# EAGLE board PCB-neue-Widerstände_2025-07-04.PCB (EAGLE 9.6.2)
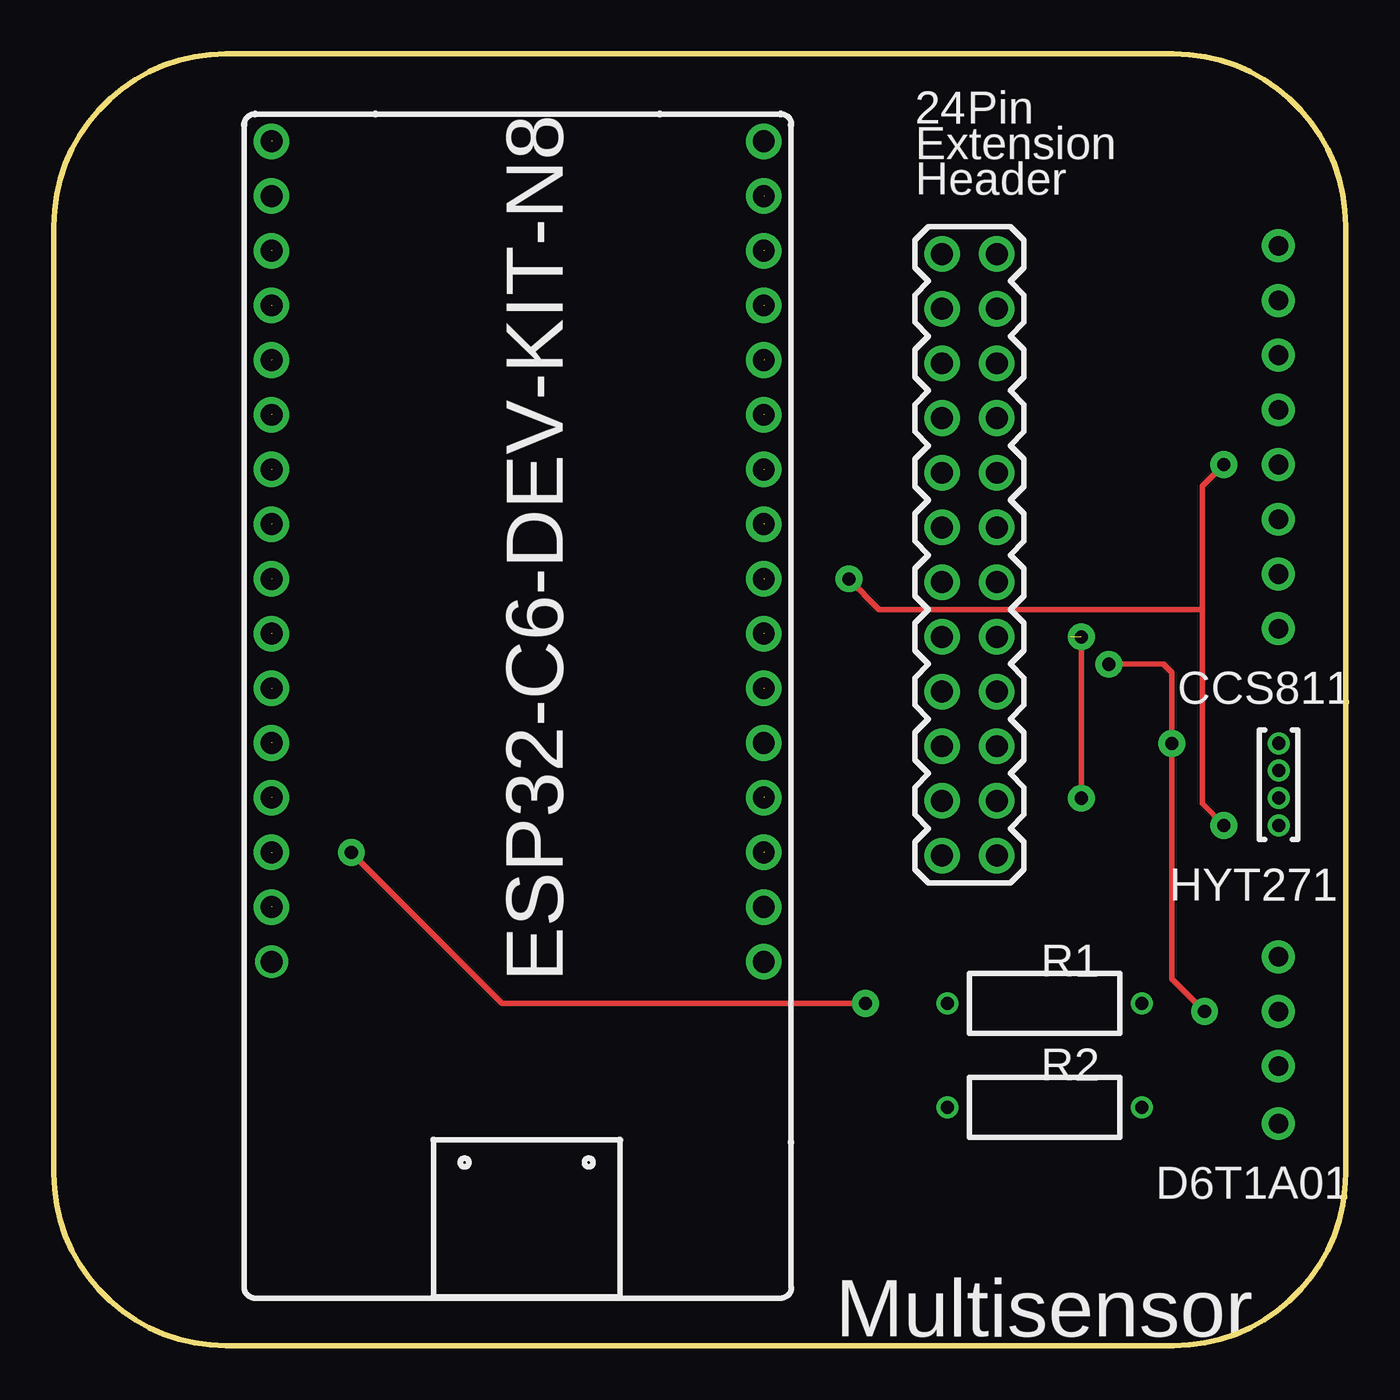
[diagram p0: board, top side]
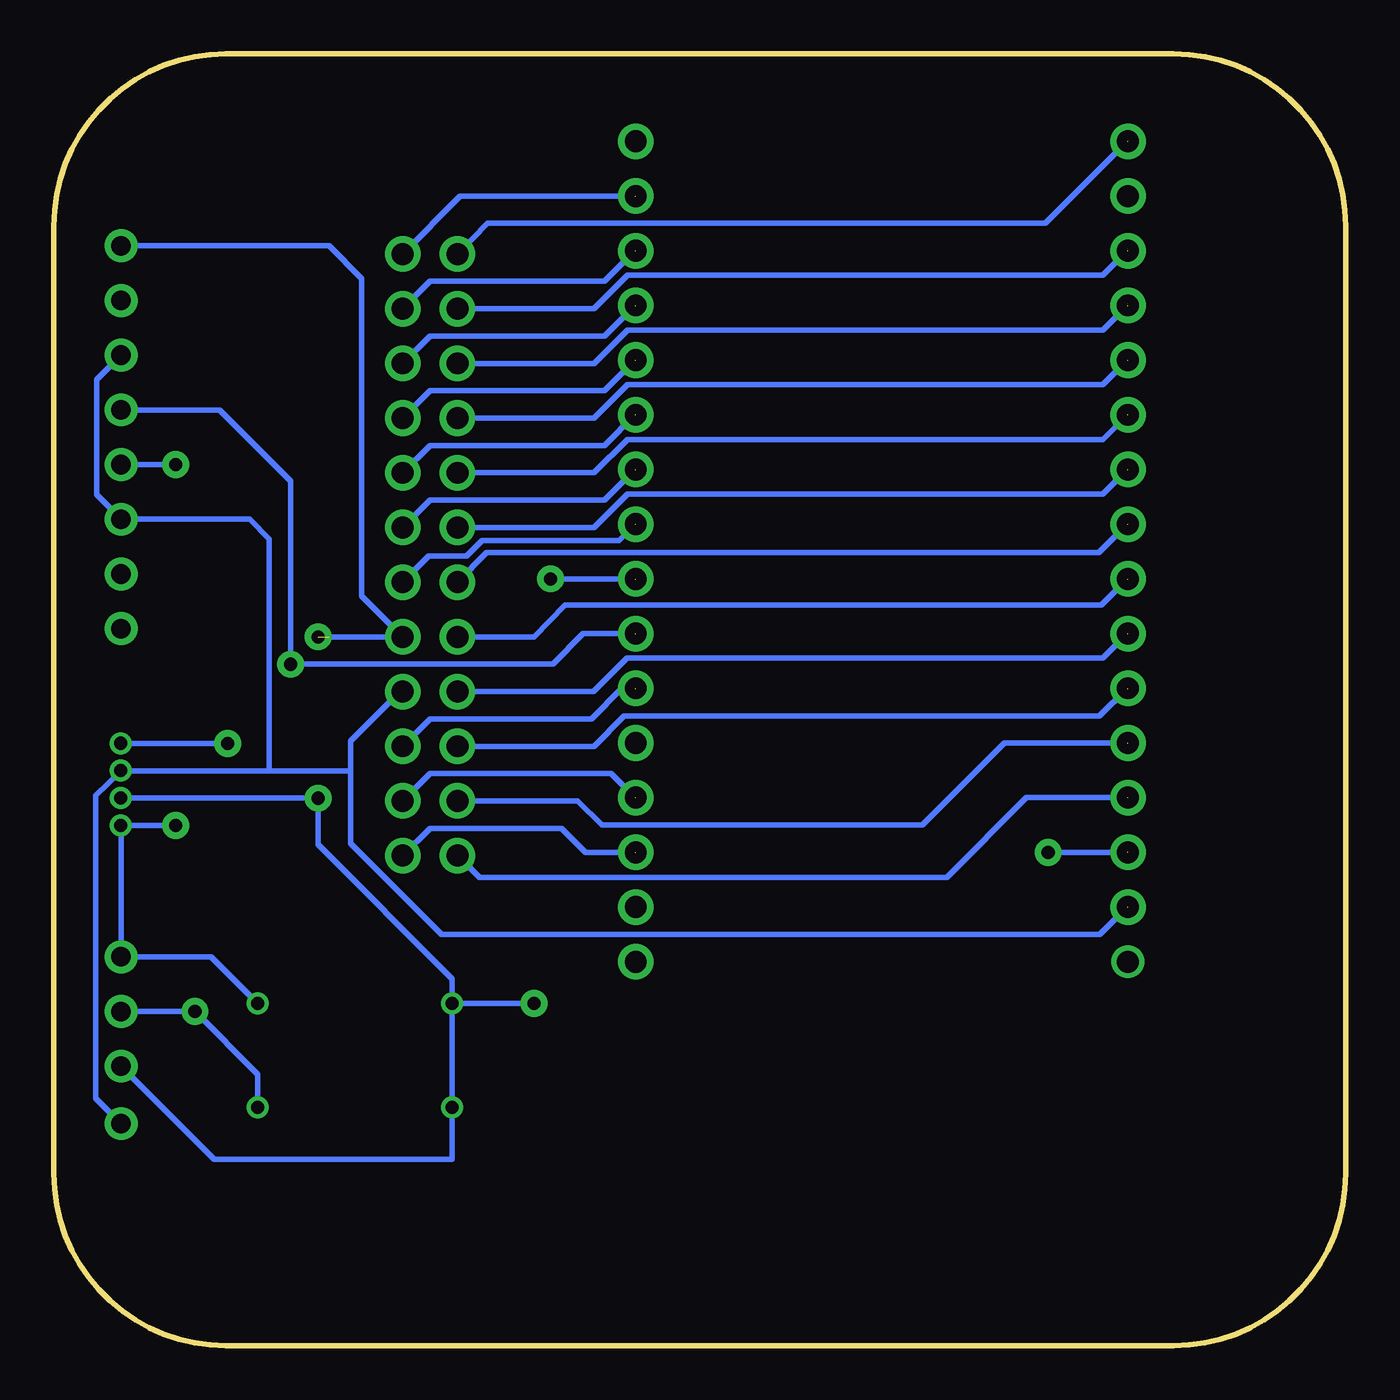
[diagram p1: board, bottom side, seen from below]

Size 59.99 x 59.99 mm. Coordinates in mm from the lower left corner, seen from the top.
Outline: 59.99,51.99 arc90 51.99,59.99 8,59.99 arc90 0,51.99 0,8 arc90 8,0 51.99,0 arc90 59.99,8 59.99,51.99
Copper layers (1*16): Top 0.035mm / dielectric 1.5mm / Bottom 0.035mm
Design rules "PCB-neue-Widerstände_2025-07-04": minimum track width 6mil, minimum drill 0.35mm, track to track 6mil, track to pad 6mil, pad to pad 6mil, via to via 6mil, smd to smd 6mil, copper to edge 40mil, drill to drill 6mil, minimum pad ring 0mil, minimum via ring 0mil, stop-mask expansion 4mil, vias tented up to drill 0mil, thermal gap 10mil

## Footprints (pad centres in the part's own frame; a part is rotated, then mirrored left to right if it is on the bottom)
PIN-HEADER-210S-2X12P_WK_1PRIMARY = drill 1.016 pad 1.651: 1 -3.81,0; 2 -1.27,0; 3 1.27,0; 4 3.81,0; 5 6.35,0; 6 8.89,0; 7 11.43,0; 8 13.97,0; 9 16.51,0; 10 19.05,0; 11 21.59,0; 12 24.13,0; 13 -3.81,-2.54; 14 -1.27,-2.54; 15 1.27,-2.54; 16 3.81,-2.54; 17 6.35,-2.54; 18 8.89,-2.54; 19 11.43,-2.54; 20 13.97,-2.54; 21 16.51,-2.54; 22 19.05,-2.54; 23 21.59,-2.54; 24 24.13,-2.54
CCS811_JOY-IT_1PRIMARY = drill 0.914 pad 1.524: 1 0,0; 2 0,-2.54; 3 0,-5.08; 4 0,-7.62; 5 0,-10.16; 6 0,-12.7; 7 0,-15.24; 8 0,-17.78
D6T1A01_1PRIMARY = drill 0.914 pad 1.524: 1 0,0; 2 0,-2.54; 3 0,-5.08; 4 0,-7.747
P:EX40Y40D241 = drill 0.61 pad 1.016: 1 0,0
P:EX126Y126D1261 = drill 3.2 pad 3.2: 1 0,0
ESP32-C6-DEV-KIT-N8_1PRIMARY = drill 1.016 pad 1.651: 1 0.102,0.025; 2 0.102,-2.515; 3 0.102,-5.055; 4 0.102,-7.595; 5 0.102,-10.135; 6 0.102,-12.675; 7 0.102,-15.215; 8 0.102,-17.755; 9 0.102,-20.295; 10 0.102,-22.835; 11 0.102,-25.375; 12 0.102,-27.915; 13 0.102,-30.455; 14 0.102,-32.995; 15 0.102,-35.535; 17 22.962,-38.075; 18 22.962,-35.535; 19 22.962,-32.995; 20 22.962,-30.455; 21 22.962,-27.915; 22 22.962,-25.375; 23 22.962,-22.835; 24 22.962,-20.295; 25 22.962,-17.755; 26 22.962,-15.215; 27 22.962,-12.675; 28 22.962,-10.135; 29 22.962,-7.595; 30 22.962,-5.055; 31 22.962,-2.515; 32 22.962,0.025 | drill 1.016 pad 1.524: 16 0.102,-38.075
WIDERSTAND_1PRIMARY = drill 0.61 pad 1.016: 1 0,0; 2 9.017,0

## Placement (x,y rotation side)
24  2X12_PIN_HEADER_MALE  [PIN-HEADER-210S-2X12P_WK_1PRIMARY]  43.79,46.89 270 top
CCS811  CCS811_Joy-It  [CCS811_JOY-IT_1PRIMARY]  56.87,51.08 0 top
D6T1A01  D6T1A01  [D6T1A01_1PRIMARY]  56.87,18.06 0 top
DUMMY1  [P:EX40Y40D241]  56.88,27.98 0 top
DUMMY2  [P:EX40Y40D241]  56.88,26.71 0 top
DUMMY3  [P:EX40Y40D241]  56.88,25.44 0 top
DUMMY4  [P:EX40Y40D241]  56.88,24.17 0 top
DUMMY5  [P:EX126Y126D1261]  5.06,54.9 0 top
DUMMY6  [P:EX126Y126D1261]  5.06,4.86 0 top
DUMMY7  [P:EX126Y126D1261]  54.98,4.86 0 top
DUMMY8  [P:EX126Y126D1261]  54.98,54.9 0 top
EBYOFHXR  [EBYOFHXR_1PRIMARY]  60.27,26.06 0 top
ESP32-C6-DEVKITC-1  ESP32-C6-DEV-KIT  [ESP32-C6-DEV-KIT-N8_1PRIMARY]  10.01,55.91 0 top
HYT271  HYT271  [HYT271_1PRIMARY]  56.87,27.97 270 top
R1  WIDERSTAND  [WIDERSTAND_1PRIMARY]  41.5,15.9 0 top
R2  WIDERSTAND  [WIDERSTAND_1PRIMARY]  41.5,11.07 0 top

## Library data of the parts
24 CCS811 D6T1A01 DUMMY1-DUMMY8 EBYOFHXR ESP32-C6-DEVKITC-1 HYT271 R1 R2 = PCB-neue-Widerstände_2025-07-04

## Nets
3V3: 24.13 ESP32-C6-DEVKITC-1.1
5V0: 24.8 CCS811.1 D6T1A01.3 ESP32-C6-DEVKITC-1.14 R1.1 R2.1
GND: D6T1A01.4
GPIO0: 24.18 ESP32-C6-DEVKITC-1.7
GPIO1: 24.19 ESP32-C6-DEVKITC-1.8
GPIO2: 24.23 ESP32-C6-DEVKITC-1.12
GPIO3: 24.24 ESP32-C6-DEVKITC-1.13
GPIO4: 24.14 ESP32-C6-DEVKITC-1.3
GPIO5: 24.15 ESP32-C6-DEVKITC-1.4
GPIO6: 24.16 ESP32-C6-DEVKITC-1.5
GPIO7: 24.17 ESP32-C6-DEVKITC-1.6
GPIO8: 24.20 ESP32-C6-DEVKITC-1.9
GPIO9: 24.10 ESP32-C6-DEVKITC-1.22
GPIO10: 24.21 ESP32-C6-DEVKITC-1.10
GPIO11: 24.22 ESP32-C6-DEVKITC-1.11
GPIO12: 24.12 ESP32-C6-DEVKITC-1.19
GPIO13: 24.11 ESP32-C6-DEVKITC-1.20
GPIO15: 24.3 ESP32-C6-DEVKITC-1.29
GPIO16: 24.1 ESP32-C6-DEVKITC-1.31
GPIO17: 24.2 ESP32-C6-DEVKITC-1.30
GPIO20: 24.7 ESP32-C6-DEVKITC-1.25
GPIO21: 24.6 ESP32-C6-DEVKITC-1.26
GPIO22: 24.5 ESP32-C6-DEVKITC-1.27
GPIO23: 24.4 ESP32-C6-DEVKITC-1.28
S$1: 24.9 ESP32-C6-DEVKITC-1.15
S$2: CCS811.3 CCS811.6
SCL: CCS811.5 D6T1A01.1 ESP32-C6-DEVKITC-1.24 R1.2
SDA: CCS811.4 D6T1A01.2 ESP32-C6-DEVKITC-1.23 R2.2

## Tracks (layer width: path | path; a pad name or v marks a point on that pad's centre or on a via)
3V3  (1 unrouted)
  Bottom 0.254: 10.14,55.93 13.95,52.12 39.85,52.12 24.13
5V0  (via drill 0.61 pad 1.24)  (2 unrouted)
  Top 0.254: v13.82,22.91 20.83,15.9 v37.69,15.9 | v47.73,25.43 v47.73,32.92
  Bottom 0.254: D6T1A01.3 52.55,8.66 41.5,8.66 R2.1 R1.1 | R1.1 41.5,17.04 47.73,23.27 v47.73,25.43 56.87,25.43 | v37.69,15.9 R1.1 | 10.14,22.91 v13.82,22.91 | 47.22,32.92 24.8 45.7,34.82 45.7,49.55 47.22,51.08 CCS811.1
GND
  Bottom 0.254: 46.2,26.7 56.87,26.7 58.04,25.55 58.04,11.48 D6T1A01.4
GPIO0  (1 unrouted)
  Bottom 0.254: 10.14,40.69 11.28,39.55 33.35,39.55 34.9,38 24.18
GPIO1  (1 unrouted)
  Bottom 0.254: 10.14,38.15 11.46,36.83 39.9,36.83 24.19
GPIO2  (1 unrouted)
  Bottom 0.254: 10.14,27.99 15.85,27.99 19.66,24.18 34.54,24.18 35.66,25.3 24.23
GPIO3  (1 unrouted)
  Bottom 0.254: 10.14,25.45 14.83,25.45 18.52,21.74 40.23,21.74 24.24
GPIO4  (1 unrouted)
  Bottom 0.254: 10.14,50.85 11.28,49.71 33.35,49.71 34.9,48.16 24.14
GPIO5  (1 unrouted)
  Bottom 0.254: 10.14,48.31 11.28,47.17 33.35,47.17 34.9,45.62 24.15
GPIO6  (1 unrouted)
  Bottom 0.254: 10.14,45.77 11.28,44.63 33.35,44.63 34.9,43.08 24.16
GPIO7  (1 unrouted)
  Bottom 0.254: 10.14,43.23 11.28,42.09 33.35,42.09 34.9,40.54 24.17
GPIO8  (1 unrouted)
  Bottom 0.254: 10.14,35.61 11.35,34.39 36.25,34.39 37.69,32.92 24.20
GPIO9  (1 unrouted)
  Bottom 0.254: 32.99,30.53 33.63,30.53 35.03,29.11 42.52,29.11 24.10
GPIO10  (1 unrouted)
  Bottom 0.254: 10.14,33.07 11.28,31.93 33.38,31.93 34.93,30.38 24.21
GPIO11  (1 unrouted)
  Bottom 0.254: 10.14,30.53 11.43,29.24 33.5,29.24 34.9,27.84 24.22
GPIO12  (1 unrouted)
  Bottom 0.254: 32.99,22.91 35.31,22.91 36.42,24.03 42.52,24.03 24.12
GPIO13  (1 unrouted)
  Bottom 0.254: 32.99,25.45 34.11,26.57 42.52,26.57 24.11
GPIO15  (1 unrouted)
  Bottom 0.254: 32.99,48.31 34.42,46.89 42.52,46.89 24.3
GPIO16  (1 unrouted)
  Bottom 0.254: 32.99,53.39 41.12,53.39 24.1
GPIO17  (1 unrouted)
  Bottom 0.254: 32.99,50.85 34.42,49.43 42.52,49.43 24.2
GPIO20  (1 unrouted)
  Bottom 0.254: 24.7 42.6,36.68 40.82,36.68 40.11,37.39 33.76,37.39 32.99,38.15
GPIO21  (1 unrouted)
  Bottom 0.254: 32.99,40.69 34.42,39.27 42.52,39.27 24.6
GPIO22  (1 unrouted)
  Bottom 0.254: 32.99,43.23 34.42,41.81 42.52,41.81 24.5
GPIO23  (1 unrouted)
  Bottom 0.254: 32.99,45.77 34.42,44.35 42.52,44.35 24.4
S$1  (1 unrouted)
  Bottom 0.254: 24.9 43.92,30.38 46.2,28.09 46.2,23.32 41.99,19.1 11.41,19.1 10.14,20.37
S$2
  Bottom 0.254: CCS811.3 58.01,44.86 58.01,39.52 CCS811.6 50.9,38.38 49.99,37.46 49.99,26.7
SCL  (via drill 0.61 pad 1.24)  (1 unrouted)
  Top 0.254: 53.34,34.19 53.34,25.17 v54.33,24.16 | 53.34,34.19 53.34,39.93 v54.33,40.92 | 53.34,34.19 38.33,34.19 v36.93,35.61
  Bottom 0.254: R1.2 52.68,18.06 D6T1A01.1 56.87,24.16 v54.33,24.16 | v54.33,40.92 CCS811.5 | 32.99,35.61 v36.93,35.61
SDA  (via drill 0.61 pad 1.24)  (1 unrouted)
  Top 0.254: v53.44,15.52 51.92,17.04 v51.92,27.96 51.92,31.27 51.54,31.65 v49,31.65
  Bottom 0.254: R2.2 50.52,12.6 v53.44,15.52 D6T1A01.2 | v51.92,27.96 56.87,27.96 | 32.99,33.07 35.41,33.07 36.8,31.65 v49,31.65 49,40.16 52.3,43.46 CCS811.4

## Text on the board
tPlace: Pin | Extension | Header | Multisensor